# Altium PCB RadarControl_V1.00.PcbDoc
Units mil, origin at the board's own origin, x right, y up, seen from the top; angles counter-clockwise.
Board outline 6000 x 4000 mil, 2 copper layers (Top Layer, Bottom Layer); 76 components, 67 nets, 269 pads, 124 vias.
Unrouted connection lines stored in the file: 139.
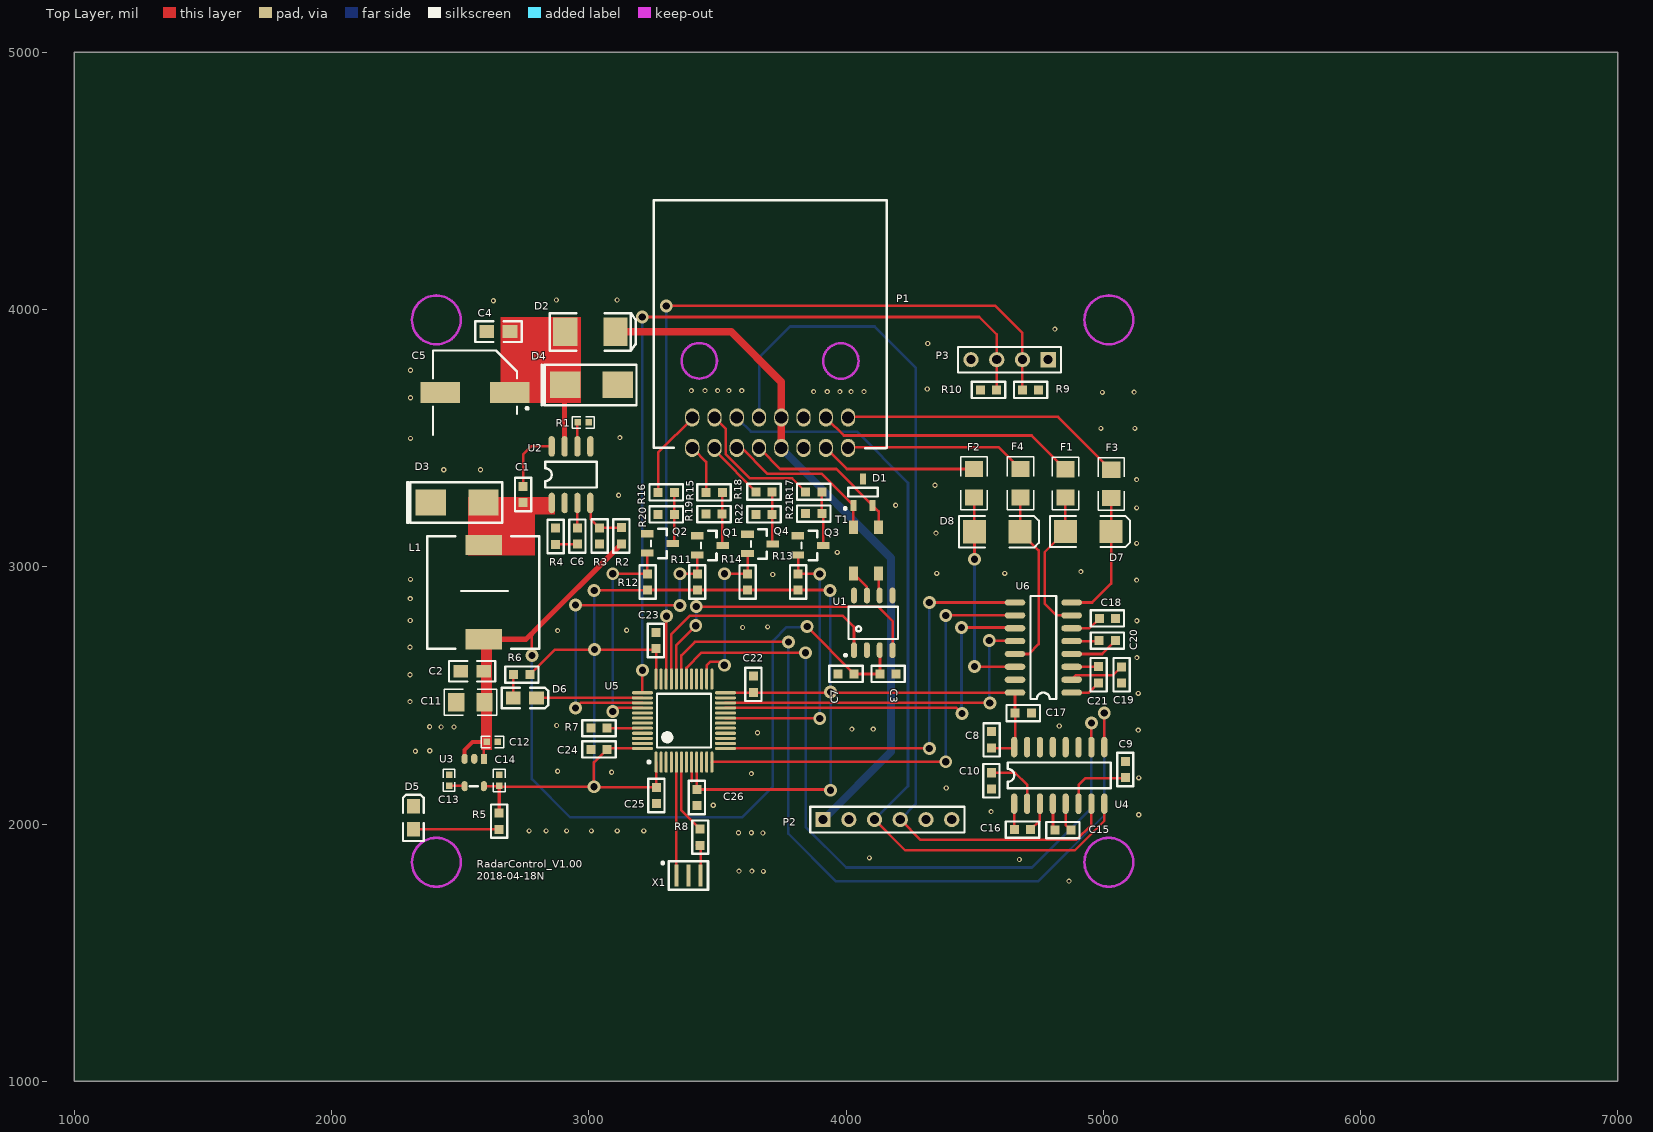
[diagram p0: Top Layer view]
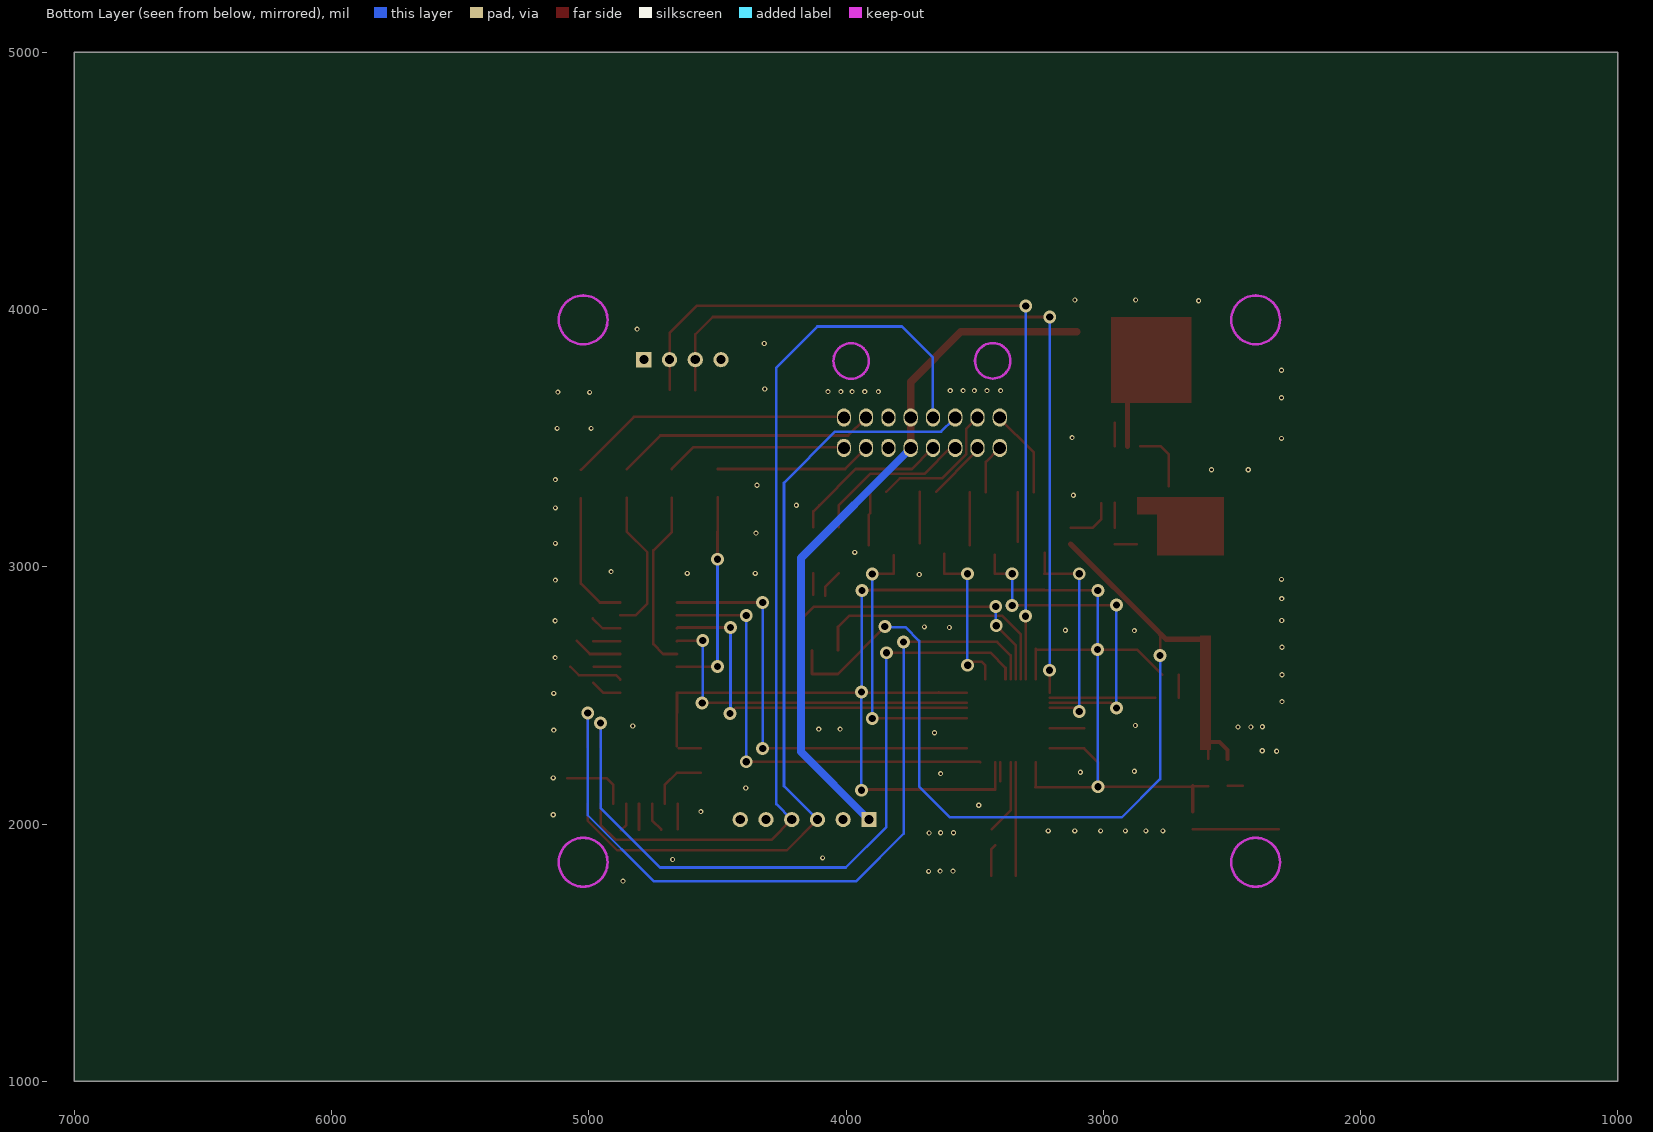
[diagram p1: Bottom Layer view, seen from below]

## Layer stack, top to bottom
Top Solder: solder mask 0.4, Solder Resist, Dk 3.5
Top Layer: signal copper 1.4
Dielectric 1: dielectric 12.6, FR-4, Dk 4.8
Bottom Layer: signal copper 1.4
Bottom Solder: solder mask 0.4, Solder Resist, Dk 3.5

## Board outline
1000,1000 7000,1000 7000,5000 1000,5000

## Design rules (kind name [scope] priority, off if disabled: settings)
Clearance [All] p1: gap=5
MinimumSolderMaskSliver [All] p1 off: minsoldermaskwidth=10
PolygonConnect [All] p1: connectstyle=Relief reliefconductorwidth=10 reliefentries=4 polygonreliefangle="90 Angle" airgapwidth=10
RoutingVias [All] p1: holewidth=28 width=50 viastyle="Through Hole" minholewidth=28 minwidth=50 maxholewidth=28 maxwidth=50
SilkToSilkClearance [All] p1 off: silktosilkclearance=10
SilkToSolderMaskClearance [IsPad] p1 off: minsilkscreentomaskgap=10 clearancetoexposedcopper=TRUE
SolderMaskExpansion [All] p1: expansion=4
Width [All] p1: maxlimit=30 minlimit=10 preferedwidth=10
27 further rules are at their usual default settings.

## Components (designator, comment, footprint, x,y, rotation, side; value= is the part's Value field where it differs from the comment)
C1 "100nF" 0603 2749,3220 r180 top
C2 "22uF" 0805 2547,2594 r0 top
C3 "100nF" 0603 4225,2588 r270 top
C4 "10uF" 0805 2649,3914 r0 top
C5 "47uF" cap_pol_8*10.2 2558,3677 r180 top
C6 "150pF" 0603 2960,3058 r180 top
C7 "22uF/10V" 0603 3939,2579 r90 top
C8 "100nf" 0603 4570,2266 r180 top
C9 "100nf" 0603 5090,2151 r180 top
C10 "100nf" 0603 4561,2229 r0 top
C11 "22uF" 1206 2595,2473 r180 top
C12 "100nF" 0402 2519,2315 r90 top
C13 "NULL" 0402 2461,2064 r180 top
C14 "1uF" 0402 2656,2063 r180 top
C15 "100nf" 0603 4782,1972 r90 top
C16 "100nf" 0603 4625,1974 r90 top
C17 "100nf" 0603 4628,2427 r90 top
C18 "100nf" 0603 4954.95,2795 r90 top
C19 "100nf" 0603 5067,2641.05 r0 top
C20 "100nf" 0603 5077,2717 r270 top
C21 "100nf" 0603 4986,2519 r180 top
C22 "100nF" 0603 3644,2482 r180 top
C23 "100nF" 0603 3265,2652 r180 top
C24 "100nF" 0603 3101.05,2294 r270 top
C25 "100nF" 0603 3259,2172 r0 top
C26 "1uF" 0603 3416,2164 r0 top
D1 "PESD2CAN" SOT23 4068,3291 r90 top
D2 "1N4007" 6032_pol 3004,3915 r0 top
D3 "B290-13-F" B290 2386,3250 r0 top
D4 "SMAJ36CA" B290 2908,3707 r0 top
D5 "LED_POWER" 0805-LED 2318,2024 r90 top
D6 "LED0" 0805-LED 2752,2490 r0 top
D7 "SMBJ18CA" SMB 4942,3137 r0 top
D8 "SMBJ18CA" SMB 4588,3136 r0 top
F1 "SMD1206-010" 1206 4853,3379 r270 top
F2 "SMD1206-010" 1206 4498,3380 r270 top
F3 "SMD1206-010" 1206 5031,3377 r270 top
F4 "SMD1206-010" 1206 4678,3380 r270 top
L1 "22uH" 10*10Inductor 2591,2718 r0 top
P1 "1318382(16PIN)" "16pin 1318382" 4120,3480 r180 top
P2 "2.54MM-5PIN" HDR1X6 3911,2017 r0 top
P3 "2.54mm/4pin" HDR1X4 4786,3805 r180 top
Q1 "LMBT3904LT1G" LC-SOT-23(SOT-23-3) 3471,3083 r180 top
Q2 "LMBT3904LT1G" LC-SOT-23(SOT-23-3) 3277,3091 r180 top
Q3 "LMBT3904LT1G" LC-SOT-23(SOT-23-3) 3862,3083 r180 top
Q4 "LMBT3904LT1G" LC-SOT-23(SOT-23-3) 3666,3089 r180 top
R1 "200K" 0402 2872,3557 r90 top
R2 "205K" 0603 3131,3059 r180 top
R3 "40.2K" 0603 3038,3181 r0 top
R4 "100k" 0603 2875,3057 r180 top
R5 "510R" 0603 2647,2072 r0 top
R6 "2.2K" 0603 2801,2585 r270 top
R7 "10K" 0603 2979,2368 r90 top
R8 "100" 0603 3429,2010 r0 top
R9 "1K" 0603 4779,3692 r270 top
R10 "1K" 0603 4493,3683 r90 top
R11 "10K" 0603 3426,2880 r180 top
R12 "10K" 0603 3233,2880 r180 top
R13 "10K" 0603 3818,2880 r180 top
R14 "10K" 0603 3622,2880 r180 top
R15 "100k" 0603 3426.24,3284.75 r90 top
R16 "100k" 0603 3240.24,3284.75 r90 top
R17 "100k" 0603 3813.76,3287.25 r90 top
R18 "100k" 0603 3619.95,3287.25 r90 top
R19 "10K" 0603 3548.28,3208.75 r270 top
R20 "10K" 0603 3362.28,3208 r270 top
R21 "10K" 0603 3935.8,3211.25 r270 top
R22 "10K" 0603 3742,3208 r270 top
T1 "ACT45B-510-2P" ACT45B-510-2P 4127,2974 r90 top
U1 "TJA1050T" SO8 4105,2781 r90 top
U2 "MP2565DN" so-8 2856,3248 r90 top
U3 "RT9013-33GB" SOT-23-5 2553,2206 r180 top
U4 "SP3232EEN" SO-16 4654,2079 r90 top
U5 "STM32F103C8T6" STM-LQFP48_M 3370,2402 r90 top
U6 "SP3232EEN" SO-16 4877,2511 r180 top
X1 "8M smd" 8M 3340.47,1799.53 r0 top

## Footprints (in the part's own frame and the unit in brackets; to place one, negate y for a bottom-side part, rotate by r counter-clockwise, add the part's x,y. Pads: shape width x height; smd on the part's side, far side on the other; paste and mask are expansions set on the pad)
8M [mm]
  rect 0.4x2.2 smd: 1(0,0) 2(1.2,0) 3(2.4,0)
  silkscreen extent -1.45,-1.39 3.13,1.4
10*10Inductor [mm]
  rect 3.6x2 smd: 1(0,0) 2(0,9.3)
  silkscreen extent -5.55,-0.92 5.49,10.19
"16pin 1318382" [mm] "1318382"
  oval 1.4x1.8 hole 1.2: 1(2.835,-2.542) 2(5.035,-2.542) 3(7.235,-2.542) 4(9.435,-2.542) 5(11.635,-2.542) 6(13.835,-2.542) 7(16.035,-2.542) 8(18.235,-2.542) 9(2.835,0.458) 10(5.035,0.458) 11(7.235,0.458) 12(9.435,0.458) 13(11.635,0.458) 14(13.835,0.458) 15(16.035,0.458) 16(18.235,0.458)
  Keep-Out Layer circle w0.254: c3.556,-8.128 r1.75
  Keep-Out Layer circle w0.254: c17.535,-8.142 r1.75
  silkscreen extent -0.96,-24 22.04,0.51
0402 [mil]
  rect 25x25 smd: 1(3.98,-127.99) 2(3.98,-84.98)
  silkscreen extent -19,-150 26,-63
0603 [mil]
  rect 35x35 smd: 1(4.25,-92.76) 2(4.25,-29.76)
  silkscreen extent -27,-126 36,4
0805 [mil]
  rect 57x50 smd: 1(-45,0) 2(45,0)
  silkscreen extent -90,-40 90,40
0805-LED [mil]
  rect 57x50 smd: 1(-45,0) 2(45,0)
  silkscreen extent -90,-40 90,40
1206 [mm]
  rect 1.6x1.8 smd: 1(0,0) 2(2.8,0)
  silkscreen extent -1.2,-1.3 4,1.3
6032_pol [mm]
  rect 2.4x2.8 smd: 1(2.538,-0.041) 2(-2.422,-0.041)
  silkscreen extent -3.95,-1.89 4.53,1.81
ACT45B-510-2P [mm]
  rect 1.35x0.9 smd: 1(0,0) 2(4.55,0) 3(0,2.5) 4(4.55,2.5)
B290 [mm]
  rect 3x2.6 smd: 1(0,0) 2(5.2,0)
  silkscreen extent -2.34,-2 7.06,2
cap_pol_8*10.2 [mm]
  rect 3.9x2.05 smd: 1(-3.443,-0.001) 2(3.457,-0.001)
  silkscreen extent -5.27,-4.15 4.16,4.15
HDR1X4 [mm] "Connector; Header; 4 Position"
  rect 1.5x1.5 hole 0.9: 1(0,0)
  round 1.5 hole 0.9: 2(2.54,0) 3(5.08,0) 4(7.62,0)
  silkscreen extent -1.27,-1.27 8.89,1.27
HDR1X6 [mm] "Connector; Header; 6 Position"
  rect 1.5x1.5 hole 0.9: 1(0,0)
  round 1.5 hole 0.9: 2(2.54,0) 3(5.08,0) 4(7.62,0) 5(10.16,0) 6(12.7,0)
  silkscreen extent -1.27,-1.27 13.97,1.27
LC-SOT-23(SOT-23-3) [mm]
  rect 1.25x0.7 smd: 1(1.25,-0.95) 2(-1.25,0) 3(1.25,0.95)
  silkscreen extent -0.65,-1.46 0.9,1.46
SMB [mm] "DO-214-AA/SMB; 2 C-Bend Leads; Body 5.3 x 3.6 mm, inc. leads (LxW)"
  rect 2.3x2.3 smd: 1(-2.25,0) 2(2.25,0)
  silkscreen extent -3.8,-1.55 4.1,1.55
SO8 [mm]
  oval 1.55x0.6 smd: 1(-2.675,1.88) 2(-2.675,0.61) 3(-2.675,-0.66) 4(-2.675,-1.93) 5(2.725,-1.93) 6(2.725,-0.66) 7(2.725,0.61) 8(2.725,1.88)
  silkscreen extent -3.3,-2.48 1.63,2.85
so-8 [mil]
  oval 80x24 smd: 1(0,0) 2(0,-50) 3(0,-100) 4(0,-150) 5(220,-150) 6(220,-100) 7(220,-50) 8(220,0)
  silkscreen extent 60,-175 160,25
SO-16 [mil]
  oval 80x24 smd: 1(0,0) 2(0,-50) 3(0,-100) 4(0,-150) 5(0,-200) 6(0,-250) 7(0,-300) 8(0,-350) 9(220,-350) 10(220,-300) 11(220,-250) 12(220,-200) 13(220,-150) 14(220,-100) 15(220,-50) 16(220,0)
  silkscreen extent 60,-375 160,25
SOT23 [mm]
  rect 1.1x0.6 smd: 1(-1.325,1.001) 2(-1.325,-0.899) 3(1.275,0.051)
  silkscreen extent -1.75,-1.4 0.4,1.93
SOT-23-5 [mm]
  rect 0.6x1 smd: 1(-0.995,-1.201)
  oval 0.6x1 smd: 2(-0.045,-1.201) 3(0.905,-1.201) 4(0.905,1.499) 5(-0.995,1.499)
  silkscreen extent -0.4,1.5 0.4,1.5, body extent -1.5,-1.3 1.4,1.5, height 1.2
STM-LQFP48_M [mm] "QFP, 48-Leads, Body 7x7mm, Pitch 0.5mm, IPC Low Density"
  oval 2.1x0.3 smd: 1(-4.1,2.75) 2(-4.1,2.25) 3(-4.1,1.75) 4(-4.1,1.25) 5(-4.1,0.75) 6(-4.1,0.25) 7(-4.1,-0.25) 8(-4.1,-0.75) 9(-4.1,-1.25) 10(-4.1,-1.75) 11(-4.1,-2.25) 12(-4.1,-2.75) 25(4.1,-2.75) 26(4.1,-2.25) 27(4.1,-1.75) 28(4.1,-1.25) 29(4.1,-0.75) 30(4.1,-0.25) 31(4.1,0.25) 32(4.1,0.75) 33(4.1,1.25) 34(4.1,1.75) 35(4.1,2.25) 36(4.1,2.75)
  oval 0.3x2.1 smd: 13(-2.75,-4.1) 14(-2.25,-4.1) 15(-1.75,-4.1) 16(-1.25,-4.1) 17(-0.75,-4.1) 18(-0.25,-4.1) 19(0.25,-4.1) 20(0.75,-4.1) 21(1.25,-4.1) 22(1.75,-4.1) 23(2.25,-4.1) 24(2.75,-4.1) 37(2.75,4.1) 38(2.25,4.1) 39(1.75,4.1) 40(1.25,4.1) 41(0.75,4.1) 42(0.25,4.1) 43(-0.25,4.1) 44(-0.75,4.1) 45(-1.25,4.1) 46(-1.75,4.1) 47(-2.25,4.1) 48(-2.75,4.1)
  silkscreen extent -4.22,-2.65 2.65,3.57, body extent -3.5,-3.5 3.5,3.5, height 1.6

## Part data
C1 C3 C6 C7 C8 C9 C10 C11 C13 C15 C16 C17 C18 C19 C20 C21 C22 C23 C24 C25 C26: library part Cap, "Capacitor"
C2 C4: library part Cap, "Capacitor,50V"
C5: library part "Cap Pol1", "Polarized Capacitor (Radial)"
C12: library part Cap, "Capacitor 5V"
C14: library part Cap, "Capacitor 3V3"
D1: library part PESD1CAN
D2 D4: library part "Diode 1N4007", "1 Amp General Purpose Rectifier"
D3: library part Diode, "Default Diode"
D5: library part LED0, "Typical INFRARED GaAs LED"
D6: "green LED"
D7 D8: library part "D Zener", "Zener Diode"
F1 F2 F3 F4: library part "Fuse 2", "Fuse"
L1: library part Inductor, "Inductor, 1A"
P1: library part 16PIN
P2: library part "Header 5", "Header, 5-Pin"
P3: library part "Header 4", "Header, 4-Pin"
Q1 Q2 Q3 Q4: library part 2N3904, "NPN General Purpose Amplifier"
R1 R2 R3 R4 R5 R6 R7 R8 R9 R10 R11 R12 R13 R14 R15 R16 R17 R18 R19 R20 R21 R22: library part Res1, "Resistor"
T1: library part "Trans Eq", "Transformer (Equivalent Circuit Model)"
U1: "CAN Tranceiver"
U2: library part MP1584, "DCDC 4.5V~28V input 1.8V ~5V output low power"
U3: library part RT9193
U4 U6: library part MAX202
U5: "ARM Cortex-M3 32-bit MCU, 64 KB Flash, 20 KB Internal RAM, 37 I/Os, 48-pin LQFP, -40 to 85 degC, Tray"

## Via types
v1: diameter 20, hole 10, Top Layer to Bottom Layer, 86 vias
v2: diameter 50, hole 28, Top Layer to Bottom Layer, 38 vias

## Nets (pads, with @x,y where several pads share a name; then routed paths per layer and width w, separated by ;. In a path a pad name is that pad's centre, name@x,y a point inside that pad or via, vN(x,y) a via of type N, cw(c..) or ccw(c..) an arc to the next point about the centre after c; other vN are vias at no path point)
24V: D2.1 P1.4 P1.12 P2.1 | length 2715.7
  Top Layer w30: D2.1 3553.63,3913.37 3748.54,3718.46 3748.54,3471.97 P1.12@3755.54,3464.97
  Bottom Layer w30: P1.12@3753.54,3466.97 3753.54,3455.46 4175,3034 4175,2281 P2.1
232_RXD1: P1.6 P2.3 U4.8 | length 3190.4
  Top Layer w10: P2.3 4230,1898 4890,1898 5004,2012 U4.8
  Bottom Layer w10: P1.6@3582.32,3583.08 3582.32,3573.08 3630.39,3525 4042,3525 4241,3326 4241,2147 P2.3
232_RXD2: F3.1 P1.1 | length 1101
  Top Layer w10: P1.1@4015.39,3583.08 4824.92,3583.08 F3.1
232_RXD3: F4.1 P1.9 | length 704.8
  Top Layer w10: P1.9@4008.39,3464.97 4593.03,3464.97 F4.1
232_TXD1: P1.5 P2.4 U4.7 | length 3612.4
  Top Layer w10: P2.4 4290,1938 4895,1938 4954,1997 U4.7
  Bottom Layer w10: P1.5@3661.93,3590.08 3661.93,3812.93 3783,3934 4111,3934 4271,3774 4271,2077 P2.4
232_TXD2: F1.1 P1.2 | length 1007.4
  Top Layer w10: P1.2@3926.77,3575.08 3991.45,3510.4 4721.6,3510.4 F1.1
232_TXD3: F2.1 P1.10 | length 600.3
  Top Layer w10: P1.10@3928.77,3454.97 4003.74,3380 F2.1
A5V0: C2.2 C3.1 C7.1 C11.1 C12.2 L1.1 R2.2 U1.3 U3.1 U3.3 | length 3683.6
  Top Layer w10: U3.1 C12.2@2592.17,2318.98 ; C12.2@2592.17,2325.02 C12.2@2592.17,2318.98 ; C12.2 C12.2@2592.17,2318.98 ; v2(2779,2655) 2779,2741.02 2784.49,2746.51 ; v2@3848,2767 C7.1 C3.1@4131.75,2583.25 ; C3.1 U1.3@4132.24,2674.46
  Top Layer w15: U3.3 2517.37,2288.37 2547.98,2318.98 C12.2@2592.17,2318.98
  Top Layer w20: L1.1 2755.98,2718 2779,2741.02 ; 2784.49,2746.51 R2.2
  Bottom Layer w10: v2@2778,2655 v2(2779,2655) 2779,2175 2928,2026 3596,2026 3716,2146 3716,2712 3769,2765 3846,2765 v2(3849,2768)
BACKDOOR: P1.16 R15.2 | length 188.2
  Top Layer w10: P1.16@3407.09,3456.97 3456,3408.06 R15.2
CAN_H: D1.1 P1.14 T1.4 | length 625.6
  Top Layer w10: P1.14@3582.32,3464.97 3591.03,3464.97 3695,3361 3906.42,3361 D1.1 T1.4@4028.6,3153.16
CAN_L: D1.2 P1.13 T1.2 | length 619.5
  Top Layer w10: P1.13@3668.93,3454.97 3743.9,3380 3962.22,3380 D1.2 4127,3215.22 T1.2
CAN_RX: U1.4 U5.32 | length 1210.4
  Top Layer w10: U5.32 3340.47,2695.47 v2(3416,2771) ; v2(3418,2845) 4125,2845 4181,2789 U1.4
  Bottom Layer w10: v2@3418,2773 v2(3418,2845)
CAN_TX: U1.1 U5.33 | length 1022.2
  Top Layer w10: U5.33 3320.79,2737.79 3392,2809 3988,2809 4031,2766 U1.1
D3V3: C8.2 C14.2 C17.2 C22.2 C23.2 C24.2 C25.2 C26.2 R5.2 R6.2 R11.2 R12.2 R13.2 R14.2 U3.5 U4.16 U5.1 U5.9 U5.24 U5.36 U5.48 U6.16 | length 6321
  Top Layer w10: U3.5 2651.03,2146.98 C14.2 ; C14.2@2653.01,2145 2655.01,2147 2657.01,2145 v2(3020,2145) 3020,2239.73 3074,2293.73 U5.48 ; R6.2 2868.49,2678 C23.2@3260.75,2678 ; v2@3020,2142.24 C25.2@3262.24,2142.24 ; v2(3021,2908) 3226.98,2908 R12.2 R14.2 R13.2 v2@3936.24,2909.76 ; U5.36 C23.2@3261.73,2681.76 ; U5.1@3262.24,2240.08 C25.2@3262.24,2142.24 ; C25.2 C25.2@3262.24,2142.24 ; C26.2@3419.21,2134.24 U5.9 ; C26.2 v2@3940,2134.24 ; U5.24 C22.2@3638.25,2510.27 ; C22.2 3640.51,2511 U6.16@4656,2511 ; C8.2@4565.75,2295.24 U4.16@4650.24,2295.24 ; C17.2@4657,2432.02 U6.16 ; U4.16@4657.76,2302.76 C17.2
  Top Layer w15: R5.2@2652.02,2048.24 C14.2
  Bottom Layer w10: v2@3021,2145 v2(3021,2908) ; v2@3938,2513 v2(3938,2908) ; v2(3940,2131) v2(3940,2513)
  other v2: 3022,2678
DGND: C2.1 C3.2 C4.1 C5.2 C7.2 C8.1 C9.1 C10.1 C11.2 C12.1 C13.1 C14.1 C17.1 C18.1 C19.1 C22.1 C23.1 C24.1 C25.1 C26.1 D1.3 D3.1 D4.2 D5.2 P1.3 P1.11 P2.2 P2.5 P3.4 Q1.1 Q2.1 Q3.1 Q4.1 R1.1 R3.1 R4.1 R7.2 R9.2 R10.2 R19.1 R20.1 R21.1 R22.1 U1.2 U1.8 U2.5 U3.2 U4.15 U5.8 U5.23 U5.35 U5.47 U6.15 X1.2 | length 74.1
  Top Layer w10: 3399.53,2166.53 U5.8
  other v1: 4867,1778 3679,1816 3584,1817 3634,1817 4674,1862 4091,1868 3677,1965 3582,1966 3632,1966 2768,1973 2834,1973 2914,1973 3010,1973 3111,1973 3214,1973 5138,2036 4564,2048 3484,2073 4390,2140 5138,2179 3632,2196 3089,2201 2879,2205 2326,2283 2382,2285 3656,2355 5136,2365 4023,2369 4106,2369 2426,2377 2476,2377 2381,2378 4829,2381 2875,2383 2305,2476 5136,2508 2305,2580 5131,2647 2305,2687 2879,2752 3147,2753 3598,2764 3695,2766 5131,2790 2306,2791 2306,2876 5130,2948 2307,2951 3715,2970 4353,2974 4617,2974 4913,2981 3966,3056 5130,3091 4350,3131 5130,3229 4193,3239 3116,3278 4346,3317 5130,3339 2436,3377 2579,3377 2307,3499 3121,3502 4991,3538 5123,3538 2307,3657 4997,3678 5120,3679 3874,3681 3927,3681 3976,3681 4020,3681 4070,3681 3399,3685 3452,3685 3501,3685 3545,3685 3595,3685 4316,3691 2307,3764 4318,3868 4812,3924 2629,4034 2874,4037 3110,4037
FRONTDOOR: P1.8 R16.2 | length 351.7
  Top Layer w10: R16.2 3270,3443.99 P1.8@3409.09,3583.08
NetC1_1: C1.1 U2.8 | length 249
  Top Layer w10: C1.1 2744.75,3436.75 2777,3469 2855,3469 U2.8
NetC1_2: C1.2 D3.2 L1.2 U2.1
NetC4_2: C4.2 C5.1 D2.2 D4.1 U2.7 | length 237
  Top Layer w20: U2.7 D4.1@2906,3705
NetC6_1: C6.1 U2.3 | length 97
  Top Layer w10: C6.1@2956,3151.01 U2.3
NetC6_2: C6.2 R4.2 | length 84
  Top Layer w10: R4.2 C6.2@2954.75,3086.76
NetC9_2: C9.2 U4.6 | length 263.1
  Top Layer w10: U4.6 4904,2151 4931.25,2178.25 C9.2@5083.76,2178.25
NetC10_2: C10.2 U4.2 | length 231.9
  Top Layer w10: C10.2 4657.76,2199.24 4704,2153 U4.2
NetC13_2: C13.2 U3.4 | length 58.4
  Top Layer w10: C13.2 U3.4@2515.38,2148.98
NetC15_1: C15.1 U4.5 | length 111.3
  Top Layer w10: U4.5 4854,1997.01 C15.1
NetC15_2: C15.2 U4.4 | length 100
  Top Layer w10: C15.2@4804.76,1978.25 U4.4@4804.76,2078.24
NetC16_1: C16.1 U4.3 | length 115.8
  Top Layer w10: C16.1 4754,2014.5 U4.3
NetC16_2: C16.2 U4.1 | length 100
  Top Layer w10: C16.2@4654,1979.02 U4.1
NetC18_2: C18.2 U6.6 | length 123.6
  Top Layer w10: U6.6 4946.46,2761 C18.2
NetC19_2: C19.2 U6.2 | length 215.1
  Top Layer w10: U6.2 4895,2579 5038.97,2579 C19.2
NetC20_1: C20.1 U6.5 | length 105.5
  Top Layer w10: U6.5 C20.1@4982.5,2711
NetC20_2: C20.2 U6.4 | length 191.7
  Top Layer w10: U6.4 4995.49,2661 C20.2
NetC21_1: C21.1 U6.3 | length 104
  Top Layer w10: U6.3 C21.1@4980.99,2611
NetC21_2: C21.2 U6.1 | length 120.4
  Top Layer w10: U6.1 4943.98,2511 C21.2
NetD5_1: D5.1 R5.1 | length 333
  Top Layer w10: D5.1 R5.1@2651.01,1979
NetD6_1: D6.1 R6.1 | length 90.7
  Top Layer w10: D6.1 R6.1@2707,2580.75
NetD6_2: D6.2 U5.38 | length 411
  Top Layer w10: D6.2 U5.38@3208,2490
NetQ1_2: Q1.2 R15.1 R19.2 | length 204.8
  Top Layer w10: Q1.2@3518.99,3084.22 R15.1
NetQ2_2: Q2.2 R16.1 R20.2 | length 191.2
  Top Layer w10: Q2.2@3332.99,3097.78 R16.1
NetQ3_2: Q3.2 R17.1 R21.2 | length 203.8
  Top Layer w10: R21.2@3906.51,3207.47 R17.1 ; Q3.2 R21.2@3911.21,3202.77
NetQ4_2: Q4.2 R18.1 R22.2 | length 200
  Top Layer w10: Q4.2@3712.71,3091.5 R18.1
NetR1_2: R1.2 U2.6 | length 92
  Top Layer w10: U2.6 R1.2@2956,3560
NetR2_1: R2.1 R3.2 U2.4 | length 193.7
  Top Layer w10: U2.4@3007.49,3246.51 3007.49,3186 R3.2 R2.1@3126.23,3151.24
NetR7_1: R7.1 U5.44 | length 135
  Top Layer w10: R7.1@3073.54,2372.47 U5.44
NetR8_1: R8.1 X1.3 | length 123.8
  Top Layer w10: R8.1@3420.25,1917.24 3434.96,1902.54 X1.3
NetR8_2: R8.2 U5.6 | length 290.8
  Top Layer w10: U5.6 3360.16,2052.84 R8.2@3433.01,1979.99
NetT1_1: T1.1 U1.6 | length 81.7
  Top Layer w10: U1.6@4127,2892.3 T1.1
NetT1_3: T1.3 U1.7 | length 107.4
  Top Layer w10: T1.3 4081,2921.57 U1.7
NetU5_5: U5.5 X1.1 | length 441.1
  Top Layer w10: X1.1 U5.5
PB1: Q3.3 R13.1 U5.19 | length 1082.1
  Top Layer w10: U5.19 v2@3896.16,2411.84 ; Q3.3@3813.75,3044.64 R13.1 v2@3897.24,2972.76
  Bottom Layer w10: v2(3898,2410) v2(3898,2972)
PB3: Q1.3 R11.1 U5.39 | length 1375.9
  Top Layer w10: v2(2949,2451) 2970,2472 3208.58,2472 U5.39 ; v2(2949,2851) v2@3354,2851 ; v2(3354,2972.76) R11.1 ; R11.1@3421.79,2972.76 Q1.3
  Bottom Layer w10: v2(2949,2451) v2(2949,2851) v2@2949,2855 ; v2@3370.76,2852.24 v2@3374,2849 ; v2@3373.49,2849 v2(3354,2849) 3353,2850 3353,2951.76 v2@3374,2972.76
PB4: Q2.3 R12.1 U5.40 | length 872.9
  Top Layer w10: v2(3093,2437) 3107.21,2451.21 U5.40 ; v2(3093,2973) R12.1@3228.5,2973 ; R12.1@3227.79,2973.72 Q2.3
  Bottom Layer w10: v2(3093,2437) v2(3093,2973)
PB13: Q4.3 R14.1 U5.26 | length 644.9
  Top Layer w10: U5.26 3458.58,2615.58 3474,2631 v2@3523,2631 ; v2(3528.24,2972.76) R14.1 Q4.3@3617.75,3050.64
  Bottom Layer w10: v2@3528.24,2618.24 v2(3528.24,2972.76)
  other v2: 3527,2617
REVERSE: P1.7 R17.2 | length 531.9
  Top Layer w10: P1.7 3532,3536.78 3532,3438.62 3626.62,3344 3791.02,3344 R17.2
RT-IN1: D8.2 F4.2 U6.13 | length 707.1
  Top Layer w10: U6.13 4711,2661 4749,2699 4749,3063.58 D8.2 F4.2@4676.58,3268.35
RT-IN2: D7.2 F3.2 U6.8 | length 515.8
  Top Layer w10: U6.8 4957,2861 5030.58,2934.58 D7.2 F3.2@5030.58,3266.35
RT-OUT1: D8.1 F2.2 U6.14 | length 813.3
  Top Layer w10: D8.1@4498,3137.42 F2.2 ; v2(4499.42,3029.42) D8.1 ; v2(4500,2612) U6.14@4657,2612
  Bottom Layer w10: v2@4499.42,2612 v2(4499.42,3029.42)
RT-OUT2: D7.1 F1.2 U6.7 | length 568.8
  Top Layer w10: F1.2 4853,3137.42 4772,3056.42 4772,2858 4819,2811 U6.7
SPEED: P1.15 R18.2 | length 237.3
  Top Layer w10: P1.15@3495.7,3464.97 3495.7,3445.52 R18.2
SWCLK: P3.3 R10.1 U5.37 | length 3082.6
  Top Layer w10: v2(3208,3971) 4518,3971 4586,3903 P3.3 ; U5.37 v2(3208.58,2597.58) ; R10.1 P3.3@4585.76,3804.76
  Bottom Layer w10: v2(3208,3971) 3208,2598.17 v2(3208.58,2597.58)
SWDIO: P3.2 R9.1 U5.34 | length 3100.1
  Top Layer w10: v2(3301,4014) 4581,4014 4686,3909 P3.2 R9.1@4686,3687.99 ; U5.34 v2@3301.1,2808
  Bottom Layer w10: v2(3302,2808) v2@3302,4014
USART1_RX: U4.9 U5.31 | length 3218.4
  Top Layer w10: U5.31 3360.16,2655.16 3413,2708 v2(3776,2708) ; U4.9 v2(5004,2432)
  Bottom Layer w10: 3775,1964 3962,1777 4747,1777 5004,2034 v2(5004,2432) ; 3776,1963 v2(3776,2708)
USART1_TX: U4.10 U5.30 | length 2905.2
  Top Layer w10: U5.30 3379.84,2606.84 3439,2666 v2(3843,2666) ; U4.10 v2(4954,2393)
  Bottom Layer w10: v2(3843,2666) 3843,1989 4001,1831 4723,1831 4954,2062 v2(4954,2393)
USART2_RX: U5.13 U6.9 | length 1676.6
  Top Layer w10: U5.13 v2@4308,2293.73 ; v2(4324,2861) U6.9
  Bottom Layer w10: v2(4324,2294) v2(4324,2861)
USART2_TX: U5.12 U6.10 | length 1745.3
  Top Layer w10: U5.12 3479.68,2242 v2(4388,2242) ; v2@4391,2811 U6.10
  Bottom Layer w10: v2(4388,2242) v2(4388,2811)
USART3_RX: U5.22 U6.12 | length 1368.5
  Top Layer w10: U5.22 v2(4559.1,2470.9) ; v2(4557,2713) 4655,2713 U6.12
  Bottom Layer w10: v2@4557,2473 v2(4557,2713)
USART3_TX: U5.21 U6.11 | length 1473.9
  Top Layer w10: U5.21 4428.79,2451.21 v2(4451,2429) ; v2(4449,2764) 4654,2764 U6.11
  Bottom Layer w10: v2(4449,2764) 4449,2431 v2(4451,2429)
pads on no net: P2.6 P3.1 U1.5 U2.2 U4.11 U4.12 U4.13 U4.14 U5.2 U5.3 U5.4 U5.7 U5.10 U5.11 U5.14 U5.15 U5.16 U5.17 U5.18 U5.20 U5.25 U5.27 U5.28 U5.29 U5.41 U5.42 U5.43 U5.45 U5.46

## Keep-outs
Keep-Out Layer:
  circle w10: c2407.42,1851.31 r94.87
  circle w10: c5021.59,1851.31 r94.87
  circle w10: c5021.59,3959.57 r94.87
  circle w10: c2407.42,3959.57 r94.87

## Other copper
Top Layer:
  rectangle net NetC4_2: 2657,3637 2969,3971
  rectangle net NetC1_2: 2590,3076 2590.72,3250
  rectangle net NetC1_2: 2530,3044 2791,3272
  rectangle net NetC1_2: 2791,3204 2869,3272
  rectangle net A5V0: 2581,2287 2624,2732

## Silkscreen, mask and mechanical layers (free items; w line width, h text height)
Top Overlay:
  text "RadarControl_V1.00 / 2018-04-18N" at 2565,1784 h30
Mechanical 1:
  circle w0.5: c2407.42,3959.57 r82.68
  circle w0.5: c5021.59,3959.57 r82.68
  circle w0.5: c2407.42,1851.31 r82.68
  circle w0.5: c5021.59,1851.31 r82.68
  lines w0.5: 2260.75,1759.08 ccw(c2296.08,1759.08) 2296.08,1723.75 5132.45,1723.75 ccw(c5132.45,1757.59) 5166.28,1757.59 5166.28,4046.74 ccw(c5126.91,4046.74) 5126.91,4086.11 2300.12,4086.11 ccw(c2300.12,4046.74) 2260.75,4046.74 2260.75,1759.08
Mechanical 10:
  lines w0.5: 5011.59,1851.31 5031.59,1851.31 5011.59,1851.31 ; 5021.59,1841.31 5021.59,1861.31 5021.59,1841.31
Mechanical 16:
  lines w0.5: 2265.69,1725.32 2265.69,4085.56
Mechanical 30:
  lines w0.5: 4486.99,2297.78 4486.99,2397.78 4882.65,2397.78 4882.65,2297.78 4486.99,2297.78

## Text inside footprints (layer, text, board x,y; h text height)
U1: Mechanical 15 "1" at 4112.47,2799.71 h30 r180